# Altium PCB Mini-Ph0xx_01.PcbDoc
Units mm, origin at the board's own origin, x right, y up, seen from the top; angles counter-clockwise.
Board outline 46 x 45.22 mm, 2 copper layers (Top Layer, Bottom Layer), stack 1.571 mm thick; 6 components, 2 nets, 19 pads, 0 vias.
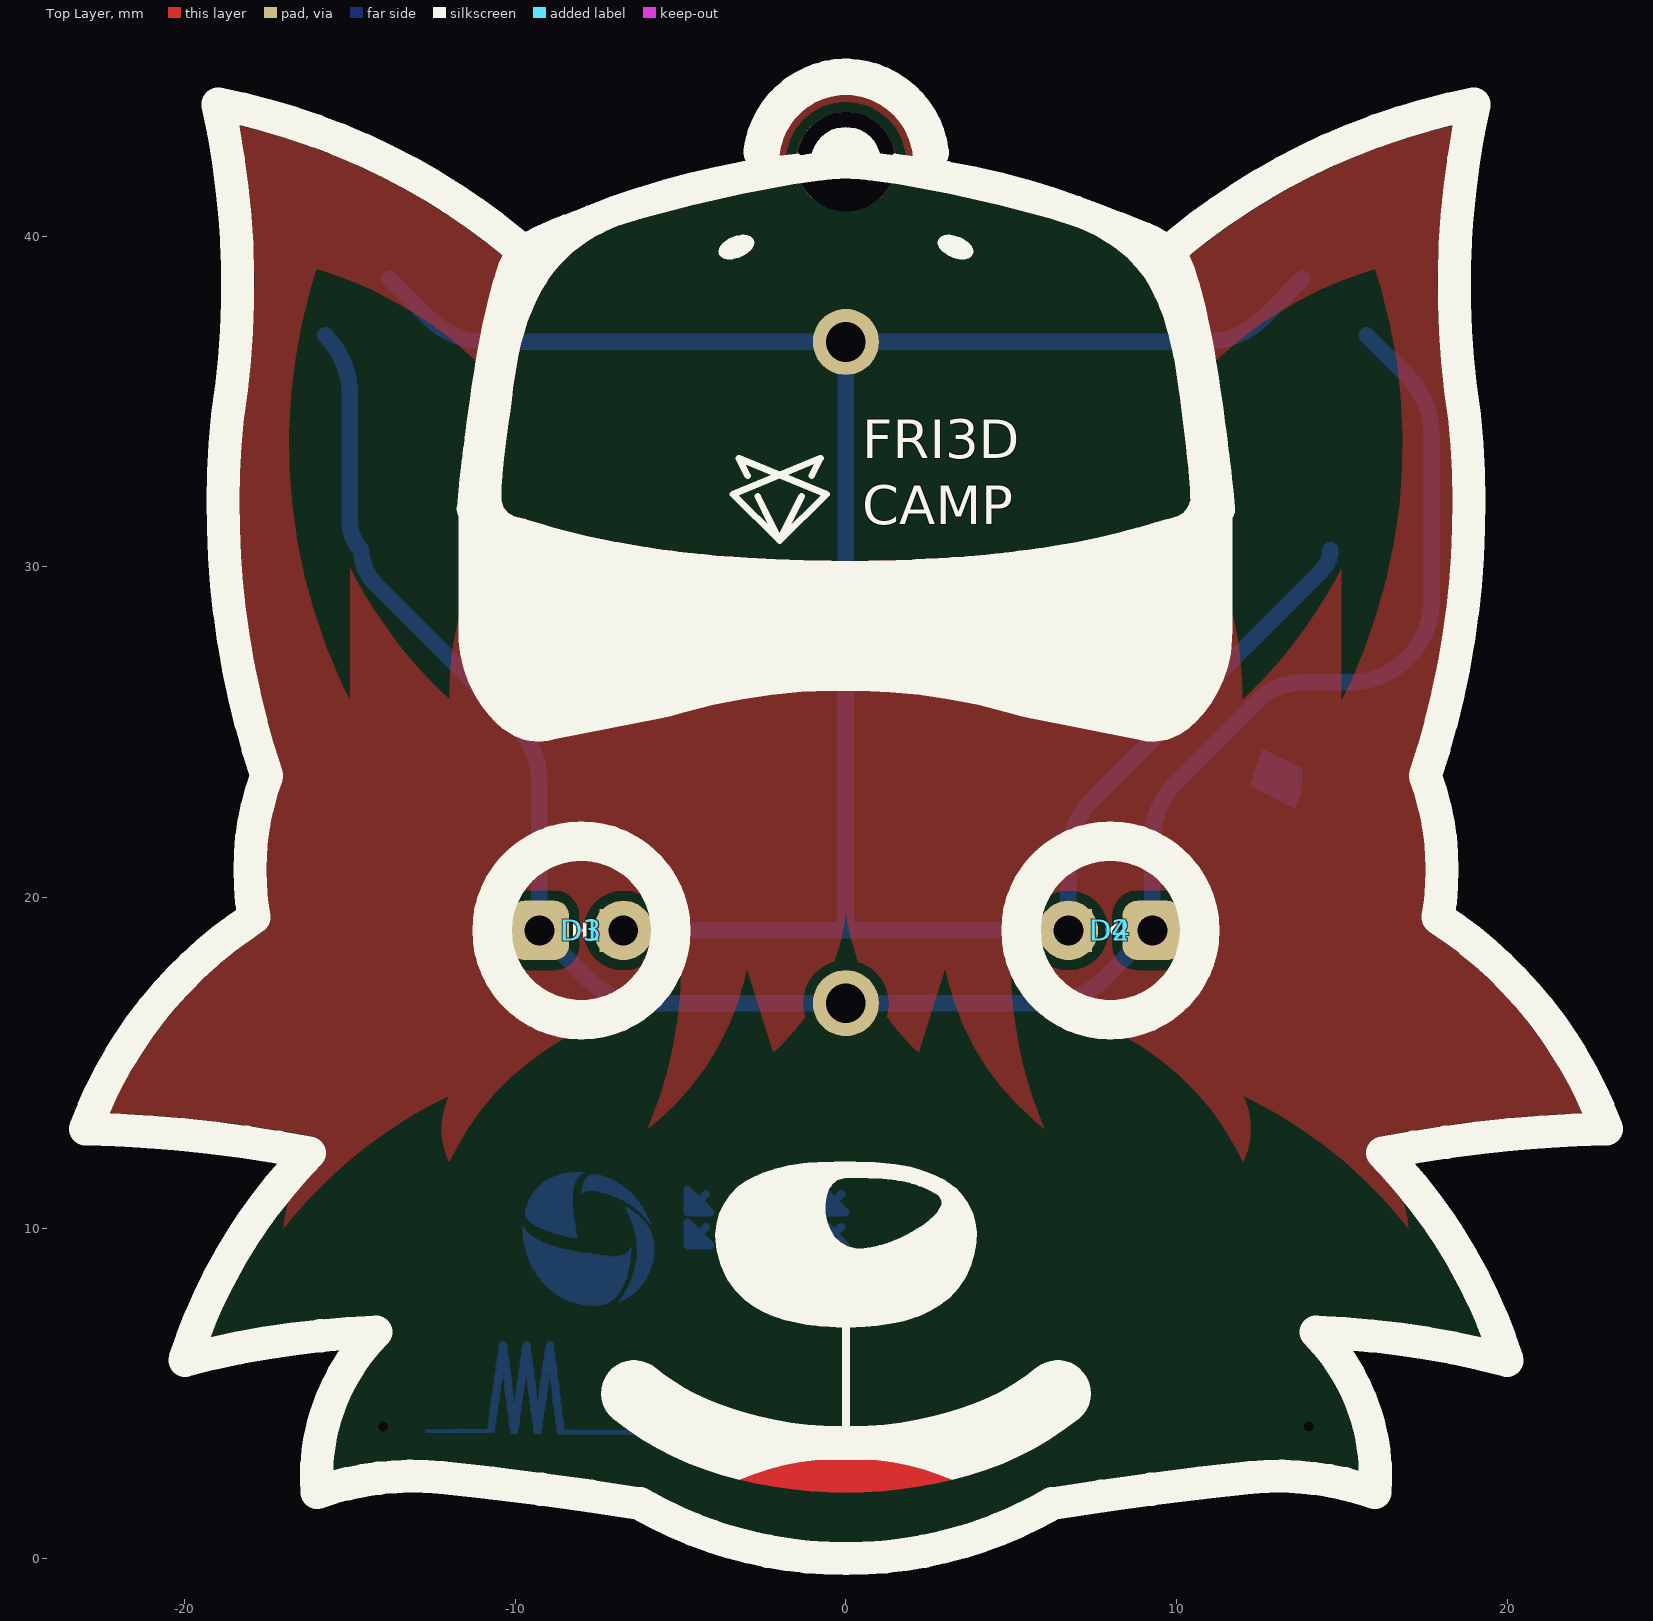
[diagram p0: Top Layer view]
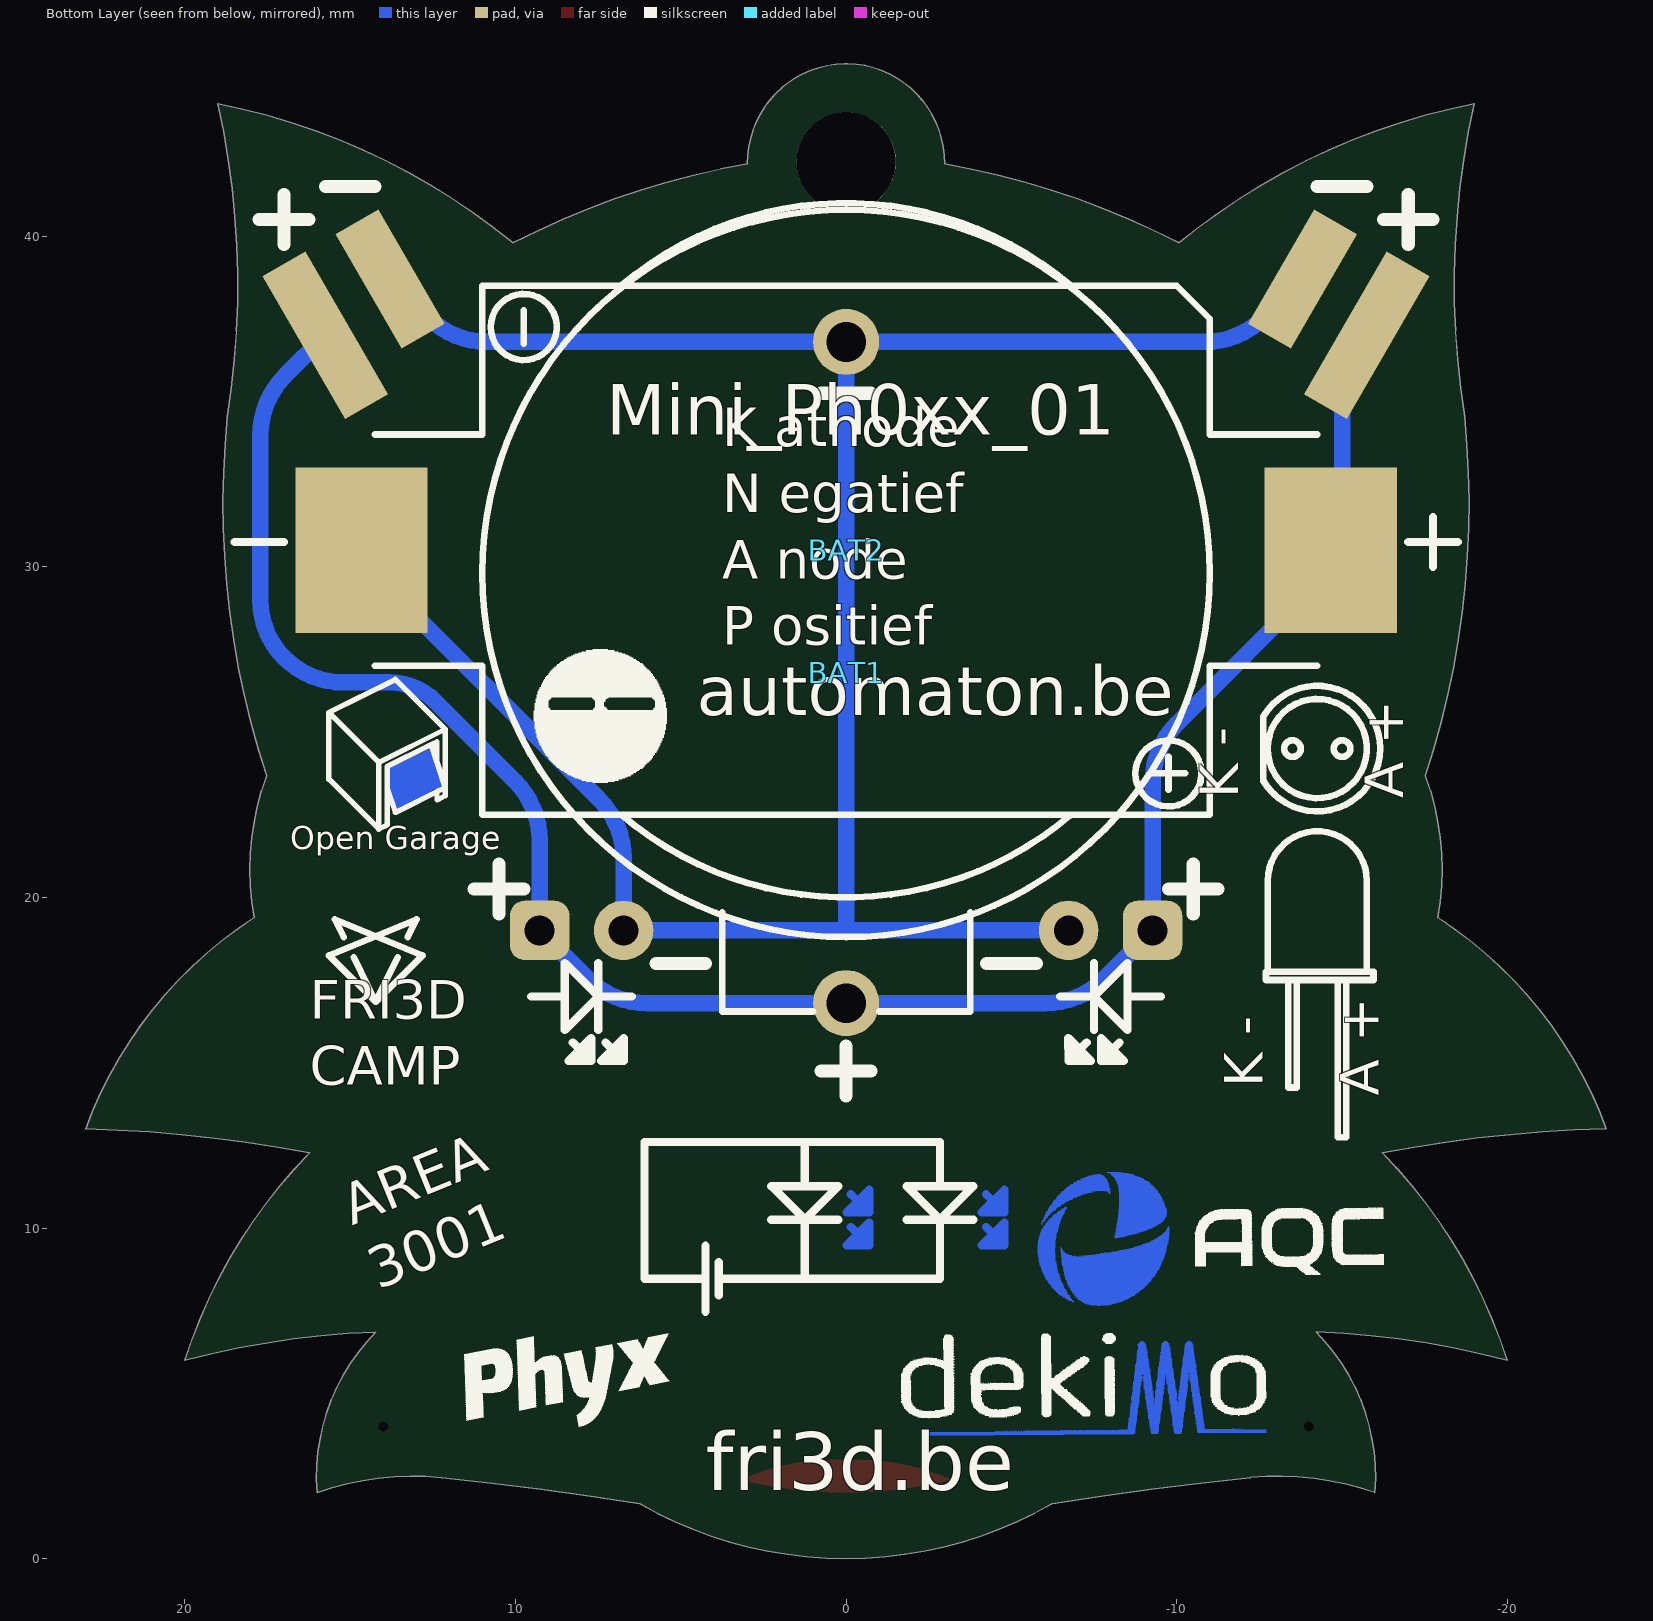
[diagram p1: Bottom Layer view, seen from below]
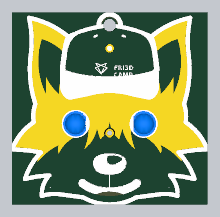
[diagram p2: 3D render of the assembled board from above, using the file's embedded part models]

## Layer stack, top to bottom
Top Solder: solder mask 0.0102, Solder Resist, Dk 3.5
Top Layer: signal copper 0.0356
Dielectric1: core 1.5, FR-4, Dk 4.8
Bottom Layer: signal copper 0.0356
Bottom Solder: solder mask 0.0102, Solder Resist, Dk 3.5

## Board outline
-15.994,2 cw(c-9.773,2.475) -14.217,6.855 ccw(c-13.244,-19.664) -19.995,6 cw(c-4.889,1.186) -16.226,12.269 -16.223,12.271 ccw(c-23.93,-27.534) -22.995,13 cw(c-10.826,8.525) -17.9,19.391 cw(c-9.791,20.837) -17.522,23.681 cw(c7.289,31.876) -18.704,34.543 ccw(c-43.838,38.504) -18.994,44.001 cw(c-22.855,24.215) -10.065,39.798 cw(c1.255,17.918) -2.978,42.187 -2.977,42.187 cw(c0.023,42.218) -0.041,45.218 0.048,45.218 0.048,45.216 cw(c-0.016,42.217) 2.984,42.187 2.973,42.187 cw(c-1.248,17.916) 10.072,39.797 cw(c22.862,24.214) 19.002,44 ccw(c43.845,38.502) 18.711,34.541 cw(c-7.282,31.875) 17.529,23.68 cw(c9.798,20.836) 17.907,19.389 cw(c10.833,8.524) 23.002,12.998 ccw(c23.937,-27.536) 16.23,12.27 16.233,12.267 cw(c4.896,1.184) 20.002,5.999 ccw(c13.251,-19.665) 14.224,6.854 cw(c9.78,2.474) 16.001,1.998 ccw(c13.086,-6.334) 12.24,2.453 12.236,2.452 ccw(c23.378,-105.269) 6.233,1.661 6.237,1.662 cw(c0.005,12.513) -6.226,1.662 ccw(c-23.371,-105.268) -12.229,2.453 -12.233,2.454 ccw(c-13.079,-6.333)

## Design rules (kind name [scope] priority, off if disabled: settings)
BoardOutlineClearance [NOT OnLayer('Top Overlay') AND NOT OnLayer('Bottom Overlay') AND NOT IsText] p1: gap=0.5 ignorepadtopadclearanceinfootprint=FALSE except(0: Arc-SplitContinuation Track-SplitContinuation SMDPad-SplitContinuation THPad-SplitContinuation Via-SplitContinuation Fill-SplitContinuation Poly-SplitContinuation Region-SplitContinuation Text-SplitContinuation)
Clearance [All] p1: gap=0.15 ignorepadtopadclearanceinfootprint=FALSE except(0: Arc-Hole Track-Hole SMDPad-Hole THPad-Hole Via-Hole Fill-Hole Poly-Hole Region-Hole Text-Hole; 0.3: Arc-Poly Track-Poly THPad-Poly Via-Poly Fill-Poly; 1.1: Poly-Poly)
HoleSize [All] p1: absolutevalues=TRUE maxlimit=10 minlimit=0.025 maxpercent=80.000 minpercent=20.000
PolygonConnect PolygonConnect_VIA [IsVia] p1: connectstyle=Direct reliefconductorwidth=0.254 reliefentries=4 polygonreliefangle="90 Angle" airgapwidth=0.254
PolygonConnect [All] p2: connectstyle=Relief reliefconductorwidth=0.254 reliefentries=4 polygonreliefangle="90 Angle" airgapwidth=0.254
RoutingVias [All] p1: holewidth=0.3 width=0.7 viastyle="Through Hole" minholewidth=0.3 minwidth=0.2 maxholewidth=0.6 maxwidth=1.2
SilkToSolderMaskClearance SilkscreenOverComponentPads [IsPad] p1: minsilkscreentomaskgap=0.254 clearancetoexposedcopper=TRUE
SolderMaskExpansion [All] p1: expansion=0.05
Width [All] p1: maxlimit=5 minlimit=0.15 preferedwidth=0.25
28 further rules are at their usual default settings.

## Components (designator, comment, footprint, x,y, rotation, side; value= is the part's Value field where it differs from the comment)
BAT1 "CR2032 Battery Holder" BAT_CR2032_China 0,23.8 r270 bottom locked value=CR2032
BAT2 "CR2032 SMD Battery Holder" BAT_CR2032_KEY_1060 0,30.5 r180 bottom locked value=CR2032
D1 "Default 5mm Blue LED" LED_5MM_BL -8,19 r0 top locked
D2 "Default 5mm Blue LED" LED_5MM_BL 8,19 r180 top locked
D3 "Default 0805 Blue LED" LED_0805_BL -8,19 r0 top
D4 "Default 0805 Blue LED" LED_0805_BL 8,19 r180 top

## Footprints (in the part's own frame and the unit in brackets; to place one, negate y for a bottom-side part, rotate by r counter-clockwise, add the part's x,y. Pads: shape width x height; smd on the part's side, far side on the other; paste and mask are expansions set on the pad)
BAT_CR2032_China [mm]
  round 2 hole 1.2: 1(7,0) 2(-13,0)
  silkscreen extent -17,-11 7.25,11, body extent -17,-11 7.25,11, height 9.2
BAT_CR2032_KEY_1060 [mm]
  rect 4x5 smd: 1(14.655,0) 2(-14.655,0)
  silkscreen extent -14.25,-10.5 14.25,10.5, body extent -15.81,-8.06 16.02,7.94, height 5.7
LED_5MM_BL [mm] "5mm LED BLUE"
  rrect50% 1.8x1.8 hole 0.9: 1(-1.27,0)
  round 1.8 hole 0.9: 2(1.27,0)
  silkscreen extent -3,-3 2.5,3, body extent -2.98,-3.01 2.44,3.01, height 12.31
LED_0805_BL [mm] "0805 LED BLUE"
  rect 1x1.3 smd: 1(-1.05,0) 2(1.05,0)
  silkscreen extent -0.2,-0.2 0.1,0.2, body extent -1.01,-0.62 1.01,0.62, height 1.1

## Part data
BAT1: library part "BAT 20mm Coin Cell Holder Generic", "=Description", Supplier 1=China
BAT2: library part "BAT # 20mm Coin Cell Holder Keystone 1060", "=Description", Supplier Part Number 1=36-1060-ND, Supplier 1=Digi-key, Supplier 2=Aliexpress
D1 D2: library part "LED Blue 5mm", "=Description"
D3 D4: library part "LED # Blue 0805", "=Description", Supplier Part Number 1=2217980, Supplier 1=Farnell

## Free pads (board coordinates)
  round 0 hole 0.3 unplated: 6(-13.993,4.001) 6(14,4)
  round 3 hole 3 unplated: 6(0,42.25)
  rect 1.5x5 smd far side rot 30: A(-15.75,37)
  rect 1.5x5 smd far side rot 150: A(15.75,37)
  rect 1.5x4 smd far side rot 30: C(-13.8,38.703)
  rect 1.5x4 smd far side rot 150: C(13.8,38.703)

## Nets (pads, with @x,y where several pads share a name; then routed paths per layer and width w, separated by ;. In a path a pad name is that pad's centre, name@x,y a point inside that pad or via, vN(x,y) a via of type N, cw(c..) or ccw(c..) an arc to the next point about the centre after c; other vN are vias at no path point)
GND: BAT1.2 BAT2.2 D1.2 D2.2 D3.2 D4.2 pad.C | length 74.9
  Bottom Layer w0.5: pad.C@-13.8,38.703 -12.641,37.544 ccw(c-10.845,39.34) -10.845,36.8 BAT1.2 ; D1.2 0,19 ; pad.C@13.8,38.703 12.641,37.544 cw(c10.845,39.34) 10.845,36.8 BAT1.2 ; BAT2.2 cw(c13.822,30.5) 14.411,29.911 7.474,22.974 ccw(c9.27,21.178) 6.73,21.178 D2.2 0,19 ; 0,19 BAT1.2
VBAT: BAT1.1 BAT2.1 D1.1 D2.1 D3.1 D4.1 pad.A | length 64.2
  Bottom Layer w0.5: pad.A@-15.75,37 -15.744,36.994 cw(c-17.54,35.198) -15,35.198 -15,31.333 ccw(c-13.822,31.333) BAT2.1 ccw(c-13.219,30.5) -14.234,29.484 -10.014,25.264 cw(c-11.81,23.468) -9.27,23.468 D1.1 -7.814,17.544 ccw(c-6.018,19.34) -6.018,16.8 BAT1.1 6.018,16.8 ccw(c6.018,19.34) 7.814,17.544 D2.1 9.27,21.718 cw(c11.81,21.718) 10.014,23.514 12.434,25.934 cw(c13.8,24.568) 13.8,26.5 15.198,26.5 ccw(c15.198,29.04) 16.994,27.244 ccw(c15.259,28.979) 17.713,28.979 17.713,33.985 ccw(c15.173,33.985) 16.969,35.781 pad.A@15.75,37
copper on no net: | length 10.8
  Bottom Layer w0.25: -4.49,9.776 -4.233,10.033 ; -4.49,10.764 -4.233,11.021 ; -0.399,9.776 -0.142,10.033 ; -0.399,10.764 -0.142,11.021 ; -4.788,9.478 -4.101,9.478 -4.788,10.166 -4.788,9.478 ; -4.788,10.467 -4.788,11.154 -4.101,10.467 -4.788,10.467 ; -0.696,9.478 -0.009,9.478 -0.696,10.166 -0.696,9.478 ; -0.696,10.467 -0.696,11.154 -0.009,10.467 -0.696,10.467

## Polygon pours and split planes (outlines as drawn)
no net on Top Overlay "NONET_L-01_P-001" (solid): -3.673,8.64 ccw(c-1.442,9.707) -2.526,7.484 ccw(c-0.917,10.64) -2.045,7.282 ccw(c-0.561,11.7) -1.469,7.129 ccw(c-0.233,13.346) -0.79,7.032 ccw(c-0.019,15.743) 0.002,6.998 ccw(c0.082,14.391) 1.51,7.137 ccw(c0.592,11.602) 2.096,7.298 ccw(c0.957,10.555) 2.582,7.512 ccw(c1.271,9.964) 2.978,7.768 ccw(c1.447,9.717) 3.84,9.074 ccw(c0.461,10.045) 3.923,9.432 ccw(c2.033,9.777) 2.972,11.453 ccw(c1.017,7.89) 1.784,11.881 ccw(c0.793,6.871) 1.487,11.93 ccw(c0.659,5.886) 1.19,11.964 ccw(c0.515,4.241) 0.893,11.984 ccw(c0.367,1.2) 0.596,11.994 0.299,11.998 0.002,11.999 ccw(c-0.094,-15.917) -0.572,11.995 ccw(c-0.352,0.815) -0.858,11.985 ccw(c-0.495,3.972) -1.145,11.967 ccw(c-0.634,5.684) -1.431,11.937 ccw(c-0.765,6.719) -1.718,11.893 ccw(c-0.884,7.366) -2.004,11.831 -2.004,11.83 ccw(c-1.015,7.872) -2.577,11.641 ccw(c-1.066,8.005) -2.864,11.508 ccw(c-1.965,9.745) -3.899,9.326 ccw(c-0.941,9.921)
no net on Top Layer "NONET_L01_P010" (solid, pour order 10): -23.961,12.271 -16.223,12.271 ccw(c-11.851,9.51) -16.998,9.999 -16.995,10 cw(c-6.065,1.464) -11.999,13.999 -11.995,14 ccw(c-9.951,13) -11.995,12 cw(c-4.522,8.527) -7.998,15.998 ccw(c-7.927,18.929) -4.997,18.858 cw(c-17.776,18.022) -5.996,12.998 -6,12.997 ccw(c-11.108,19.508) -2.997,17.865 -2.2,15.308 ccw(c-6.913,20.444) 0.005,19.592 ccw(c6.924,20.444) 2.211,15.308 3.008,17.865 ccw(c11.119,19.508) 6.011,12.997 6.007,12.998 cw(c17.787,18.022) 5.008,18.858 ccw(c7.938,18.929) 8.009,15.998 cw(c4.533,8.527) 12.006,12 ccw(c9.962,13) 12.006,14 12.009,13.999 cw(c6.076,1.464) 17.005,10 17.009,9.999 ccw(c11.862,9.51) 16.234,12.271 23.972,12.271 23.972,45.461 23.932,45.5 -23.921,45.5 -23.961,45.461

## Keep-outs
Keep-Out Layer:
  text ".Layer_Name" at 264.902,-46.311 h3.5

## Other copper
Top Layer:
  pour cut-out: -10.413,32.112 cw(c-3.33,32.052) -10.389,32.641 cw(c4.859,31.451) -10.361,32.952 -10.326,33.287 -10.284,33.637 -10.239,33.998 -10.191,34.362 -10.143,34.722 -10.097,35.072 -10.054,35.406 cw(c1.107,34.061) -9.781,36.857 cw(c-2.498,34.951) -9.587,37.485 cw(c-3.967,35.476) -9.35,38.053 cw(c-4.893,35.918) -9.069,38.562 cw(c-5.518,36.323) -8.36,39.413 cw(c-5.41,36.172) -7.438,40.057 cw(c-4.9,35.233) -6.89,40.307 cw(c4.718,2.948) -0.817,41.675 cw(c0.383,31.086) -0.411,41.714 -0.356,41.717 -0.242,41.724 -0.169,41.728 -0.099,41.73 -0.064,41.731 -0.031,41.731 0.002,41.732 cw(c0,38.093) 0.068,41.731 0.137,41.729 0.209,41.726 0.283,41.722 0.36,41.717 0.414,41.714 cw(c-0.38,31.071) 0.82,41.675 cw(c-4.717,2.942) 6.897,40.306 cw(c4.858,34.955) 7.926,39.79 cw(c5.73,36.388) 8.353,39.472 cw(c5.829,36.542) 9.329,38.188 cw(c4.301,35.757) 9.565,37.623 cw(c2.385,35.077) 9.762,36.976 cw(c-0.763,34.265) 9.925,36.24 cw(c-5.761,33.336) 10.057,35.406 10.146,34.725 10.191,34.367 10.236,34.004 10.278,33.645 10.317,33.295 10.35,32.961 10.377,32.65 cw(c-2.166,31.666) 10.396,32.368 cw(c3.143,31.958) 10.405,32.122 cw(c9.781,32.107) 9.921,31.498 ccw(c14.285,14.432) 9.134,31.277 cw(c1.433,57.786) 8.561,31.118 cw(c2.448,54.169) 5.968,30.582 cw(c1.394,60.718) 4.77,30.425 4.77,30.424 cw(c0.794,66.106) 3.385,30.297 cw(c0.311,72.784) 1.8,30.212 cw(c0.028,80.867) 0.002,30.181 cw(c-0.097,76.903) -3.393,30.298 cw(c-0.801,66.135) -4.782,30.425 cw(c-1.408,60.68) -5.981,30.583 cw(c-2.047,56.471) -7.005,30.759 cw(c-2.65,53.343) -9.146,31.28 -9.593,31.411 ccw(c-11.459,25.115) -9.928,31.501 cw(c-9.788,32.109)
  pour cut-out: 14.999,25.999 ccw(c-1388.342,27.999) 14.999,29.999 cw(c2.217,36.457) 12,25.999 ccw(c2.6,26.185) 11.655,28.715 ccw(c-98.93,29.236) 11.633,31.496 11.633,31.494 ccw(c11.095,31.795) 11.711,31.795 11.711,31.797 ccw(c-53.794,25.548) 11.146,36.172 cw(c19.5,27.412) 16,39 15.998,38.999 cw(c-0.44,33.724)
  pour cut-out: -14.999,25.999 cw(c1388.342,27.999) -14.999,29.999 ccw(c-2.217,36.457) -12,25.999 cw(c-2.6,26.185) -11.655,28.715 cw(c98.93,29.236) -11.633,31.496 -11.633,31.494 cw(c-11.095,31.795) -11.711,31.795 -11.711,31.797 cw(c53.794,25.548) -11.146,36.172 ccw(c-19.5,27.412) -16,39 -15.998,38.999 ccw(c0.44,33.724)
  region: -3.216,2.387 ccw(c-0.028,15.292) 0.002,1.998 ccw(c0.03,15.312) 3.22,2.386 ccw(c0.24,-4.517) 0.002,2.998 ccw(c-0.237,-4.52)
  text ".Layer_Name" at 264.902,-46.311 h3.5
Bottom Layer:
  region: -0.696,11.154 -0.696,10.467 -0.009,10.467
  region: -0.696,10.166 -0.009,9.478 -0.696,9.478
  region: -4.788,11.154 -4.788,10.467 -4.101,10.467
  region: -4.788,10.166 -4.101,9.478 -4.788,9.478
  region: 460 vertices and 0 holes, not listed, extent -9.695,9.686 -7.892,11.688
  region: 638 vertices and 0 holes, not listed, extent -9.77,7.646 -6.485,10.031
  region: 380 vertices and 0 holes, not listed, extent -7.984,10.171 -5.922,11.63
  region: 570 vertices and 0 holes, not listed, extent -6.882,7.761 -5.789,10.63
  region: -5.922,10.136 -5.94,10.137 -5.94,10.119 -5.905,10.119 -5.905,10.136 -5.905,10.154 -5.922,10.154
  region: 2137 vertices and 5 holes, not listed, extent -12.71,3.713 -2.314,6.588
  region: 13.8,23.9 12.6,24.5 12.225,23.375 13.587,22.688 13.8,23.337
  text ".Layer_Name" at 264.902,-46.311 h3.5

## Silkscreen, mask and mechanical layers (free items; w line width, h text height)
Top Overlay:
  drawing of 45 lines, arcs and shapes, not listed
  text "FRI3D / CAMP" at 0.498,30.889 h2
  text ".Layer_Name" at 264.902,-46.311 h3.5
Bottom Overlay:
  drawing of 148 lines, arcs and shapes, not listed
  text "Mini_Ph0xx_01" at 7.25,33.5 h2.6
  text "K athode / N egatief / A node / P ositief" at 3.75,27.25 h2
  text "automaton.be" at 4.519,25.004 h2.55
  text "A +" at -17.25,23 h2 r270
  text "K -" at -12.25,23 h2 r270
  text "Open Garage" at 16.812,21.213 h1.2
  text "K -" at -13,14.25 h2 r270
  text "A +" at -16.5,14 h2 r270
  text "FRI3D / CAMP" at 16.227,13.939 h2
  text "AREA / 3001" at 14,7.75 h2.1 r337.83
  text "fri3d.be" at 4.25,1.5 h3
  text ".Layer_Name" at 264.902,-46.311 h3.5
Top Paste:
  text ".Layer_Name" at 264.902,-46.311 h3.5
Bottom Paste:
  text ".Layer_Name" at 264.902,-46.311 h3.5
Top Solder:
  drawing of 4 lines, arcs and shapes, not listed
  text ".Layer_Name" at 264.902,-46.311 h3.5
Bottom Solder:
  text ".Layer_Name" at 264.902,-46.311 h3.5
Drill Guide:
  text ".Layer_Name" at 264.902,-46.311 h3.5
3D Symbols:
  text ".Layer_Name" at 264.902,-46.311 h3.5
Outline:
  lines w0.25: -16.226,12.269 ccw(c-4.889,1.186) -19.995,6 cw(c-13.244,-19.664) -14.217,6.855 ccw(c-9.773,2.475) -15.994,2 cw(c-13.079,-6.333) -12.233,2.454 ; -16.223,12.271 ccw(c-23.93,-27.534) -22.995,13 cw(c-10.826,8.525) -17.9,19.391 cw(c-9.791,20.837) -17.522,23.681 cw(c7.289,31.876) -18.704,34.543 ccw(c-43.838,38.504) -18.994,44.001 cw(c-22.855,24.215) -10.065,39.798 cw(c1.255,17.918) -2.978,42.187 ; -12.229,2.453 cw(c-23.371,-105.268) -6.226,1.662 ccw(c0.005,12.513) 6.237,1.662 ; -2.977,42.187 cw(c0.023,42.218) -0.041,45.218 0.048,45.218 ; 0.048,45.216 cw(c-0.016,42.217) 2.984,42.187 ; 2.973,42.187 cw(c-1.248,17.916) 10.072,39.797 cw(c22.862,24.214) 19.002,44 ccw(c43.845,38.502) 18.711,34.541 cw(c-7.282,31.875) 17.529,23.68 cw(c9.798,20.836) 17.907,19.389 cw(c10.833,8.524) 23.002,12.998 ccw(c23.937,-27.536) 16.23,12.27 ; 6.233,1.661 cw(c23.378,-105.269) 12.236,2.452 ; 12.24,2.453 cw(c13.086,-6.334) 16.001,1.998 ccw(c9.78,2.474) 14.224,6.854 cw(c13.251,-19.665) 20.002,5.999 ccw(c4.896,1.184) 16.233,12.267
Comments:
  drawing of 794 lines, arcs and shapes, not listed
  text ".Layer_Name" at 264.902,-46.311 h3.5
Fabrication:
  text "White Solder Mask" at -16,-7 h1.5
  text "Black Silkscreen" at -16,-10 h1.5
  text "Gold plated" at -16,-13 h1.5
  text "1mm Thickness" at -16,-16 h1.5
  text ".Layer_Name" at 264.902,-46.311 h3.5
Placebound Top:
  text ".Layer_Name" at 264.902,-46.311 h3.5
Placebound Bottom:
  text ".Layer_Name" at 264.902,-46.311 h3.5
Comments 2:
  lines w0.1: -16.998,9.999 cw(c-11.851,9.51) -16.223,12.271 -23.961,12.271 -23.961,45.461 -23.921,45.5 -15.759,45.5 -10.061,39.802 ccw(c-7.095,37.657) -10.5,39 ccw(c28.84,28.68) -11.711,31.797 ccw(c-11.42,31.696) -11.654,31.494 -11.654,28.058 ccw(c-7.903,27.994) -10.34,25.142 ccw(c-9.247,26.524) -9.285,24.763 ccw(c-9.287,26.282) -8.845,24.829 -5.33,25.529 cw(c-0.011,7.833) 5.316,25.527 8.831,24.826 ; -16.995,10 cw(c-6.065,1.464) -11.999,13.999 ; -11.995,14 ccw(c-9.951,13) -11.995,12 cw(c-4.522,8.527) -7.998,15.998 ccw(c-7.927,18.929) -4.997,18.858 cw(c-17.776,18.022) -5.996,12.998 ; -6,12.997 ccw(c-11.108,19.508) -2.997,17.865 -2.2,15.308 ccw(c-6.913,20.444) 0.005,19.592 ccw(c6.924,20.444) 2.211,15.308 3.008,17.865 ccw(c11.119,19.508) 6.011,12.997 ; 6.007,12.998 cw(c17.787,18.022) 5.008,18.858 ccw(c7.938,18.929) 8.009,15.998 cw(c4.533,8.527) 12.006,12 ccw(c9.962,13) 12.006,14 ; 8.856,24.829 ccw(c9.298,26.282) 9.296,24.763 ccw(c9.258,26.524) 10.351,25.142 ccw(c7.914,27.994) 11.664,28.058 11.664,31.494 ccw(c11.431,31.696) 11.722,31.797 ccw(c-28.829,28.68) 10.511,39 ccw(c7.106,37.657) 10.072,39.802 15.77,45.5 23.932,45.5 23.972,45.461 23.972,12.271 16.234,12.271 cw(c11.862,9.51) 17.009,9.999 ; 12.009,13.999 cw(c6.076,1.464) 17.005,10
Frame:
  drawing of 15 lines, arcs and shapes, not listed
  text "Document" at 260.402,-31.311 h2
  text ".PCB_TITLE" at 261.902,-36.811 h4
  text "Layer Name" at 260.402,-41.311 h2
  text "Date" at 260.402,-51.311 h2
  text "Rev" at 300.402,-51.311 h2
  text ".Print_Date" at 263.402,-56.811 h3.5
  text ".PCB_REV" at 304.902,-56.811 h4
  text "Desginer" at 210.402,-61.311 h2
  text "Document" at 260.402,-61.311 h2
  text ".Pcb_File_Name_No_Path" at 261.902,-66.311 h1.5
  text ".PCB_ENGINEER" at 214.902,-66.811 h4
Assembly Top:
  text ".Layer_Name" at 264.902,-46.311 h3.5
Assembly Bottom:
  text ".Layer_Name" at 264.902,-46.311 h3.5
Drill Drawing:
  lines w0.15: 101.543,18.955 271.356,18.955 ; 101.543,26.955 271.356,26.955 ; 108.942,16.955 108.942,28.955 ; 115.373,16.955 115.373,28.955 ; 130.602,16.955 130.602,28.955 ; 137.401,16.955 137.401,28.955 ; 147.238,16.955 147.238,28.955 ; 167.265,16.955 167.265,28.955 ; 175.183,16.955 175.183,28.955 ; 185.181,16.955 185.181,28.955 ; 193.898,16.955 193.898,28.955 ; 205.335,16.955 205.335,28.955 ; 223.17,16.955 223.17,28.955 ; 241.005,16.955 241.005,28.955 ; 252.602,16.955 252.602,28.955 ; 101.543,16.955 271.356,16.955 271.356,28.955 101.543,28.955 101.543,16.955 ; 102.346,19.555 102.346,19.777 102.568,19.999 102.346,20.221 102.346,20.444 102.568,20.444 102.79,20.221 103.012,20.444 103.235,20.444 103.235,20.221 103.012,19.999 103.235,19.777 103.235,19.555 103.012,19.555 102.79,19.777 102.568,19.555 102.346,19.555 ; 102.346,21.555 103.235,21.555 103.235,22.444 102.346,22.444 102.346,21.555 ; 102.346,23.555 102.79,23.777 103.235,23.555 103.012,23.999 103.235,24.444 102.79,24.221 102.346,24.444 102.568,23.999 102.346,23.555 ; 102.346,25.777 102.568,25.777 102.79,25.555 103.012,25.777 103.235,25.777 103.012,25.999 103.235,26.221 103.012,26.221 102.79,26.444 102.568,26.221 102.346,26.221 102.568,25.999 102.346,25.777
  text "Symbol" at 102.743,27.555 h0.96
  text "Count" at 109.542,27.555 h0.96
  text "Hole Size" at 115.973,27.555 h0.96
  text "Plated" at 131.202,27.555 h0.96
  text "Hole Type" at 138.001,27.555 h0.96
  text "Drill Layer Pair" at 147.838,27.555 h0.96
  text "Via/Pad" at 167.865,27.555 h0.96
  text "Pad Shape" at 175.783,27.555 h0.96
  text "Template" at 185.781,27.555 h0.96
  text "Description" at 194.498,27.555 h0.96
  text "Hole Tolerance (+)" at 205.935,27.555 h0.96
  text "Hole Tolerance (-)" at 223.77,27.555 h0.96
  text "Hole Length" at 241.605,27.555 h0.96
  text "Routed Path Length" at 253.202,27.555 h0.96
  text "1" at 109.542,25.555 h0.8
  text "3,000mm (118,11mil)" at 115.973,25.555 h0.8
  text "NPTH" at 131.202,25.555 h0.8
  text "Round" at 138.001,25.555 h0.8
  text "Top Layer - Bottom Layer" at 147.838,25.555 h0.8
  text "Pad" at 167.865,25.555 h0.8
  text "Rounded" at 175.783,25.555 h0.8
  text "c300hn300" at 185.781,25.555 h0.8
  text "-" at 241.605,25.555 h0.8
  text "-" at 253.202,25.555 h0.8
  text "2" at 109.542,23.555 h0.8
  text "0,300mm (11,81mil)" at 115.973,23.555 h0.8
  text "NPTH" at 131.202,23.555 h0.8
  text "Round" at 138.001,23.555 h0.8
  text "Top Layer - Bottom Layer" at 147.838,23.555 h0.8
  text "Pad" at 167.865,23.555 h0.8
  text "Rounded" at 175.783,23.555 h0.8
  text "c0hn30" at 185.781,23.555 h0.8
  text "-" at 241.605,23.555 h0.8
  text "-" at 253.202,23.555 h0.8
  text "2" at 109.542,21.555 h0.8
  text "1,200mm (47,24mil)" at 115.973,21.555 h0.8
  text "PTH" at 131.202,21.555 h0.8
  text "Round" at 138.001,21.555 h0.8
  text "Top Layer - Bottom Layer" at 147.838,21.555 h0.8
  text "Pad" at 167.865,21.555 h0.8
  text "Rounded" at 175.783,21.555 h0.8
  text "c200h120" at 185.781,21.555 h0.8
  text "-" at 241.605,21.555 h0.8
  text "-" at 253.202,21.555 h0.8
  text "4" at 109.542,19.555 h0.8
  text "0,900mm (35,43mil)" at 115.973,19.555 h0.8
  text "PTH" at 131.202,19.555 h0.8
  text "Round" at 138.001,19.555 h0.8
  text "Top Layer - Bottom Layer" at 147.838,19.555 h0.8
  text "Pad" at 167.865,19.555 h0.8
  text "(Mixed)" at 175.783,19.555 h0.8
  text "(Mixed)" at 185.781,19.555 h0.8
  text "-" at 241.605,19.555 h0.8
  text "-" at 253.202,19.555 h0.8
  text "9 Total" at 109.542,17.555 h0.8
  text ".Layer_Name" at 264.902,-46.311 h3.5

## Dimensions
-22.995,13 to 23.002,12.998 on Fabrication
0.048,45.218 to -6.5,0 on Fabrication

## Text inside footprints (layer, text, board x,y; h text height)
BAT2: Comments "Adhesive" at 2.5,28.75 h0.8 r326.89; Comments "+UP" at 11.75,29.75 h2